# Altium PCB BV100011_UniversalSlave.PcbDoc (part 2 of 2)
Units mil, origin at the board's own origin, x right, y up, seen from the top; angles counter-clockwise.
Board outline 6690 x 4040 mil, 4 copper layers (Top Layer, Layer 1, Layer 2, Bottom Layer), stack 26.156 mil thick; 242 components, 211 nets, 882 pads, 216 vias.
Unrouted connection lines stored in the file: 81.
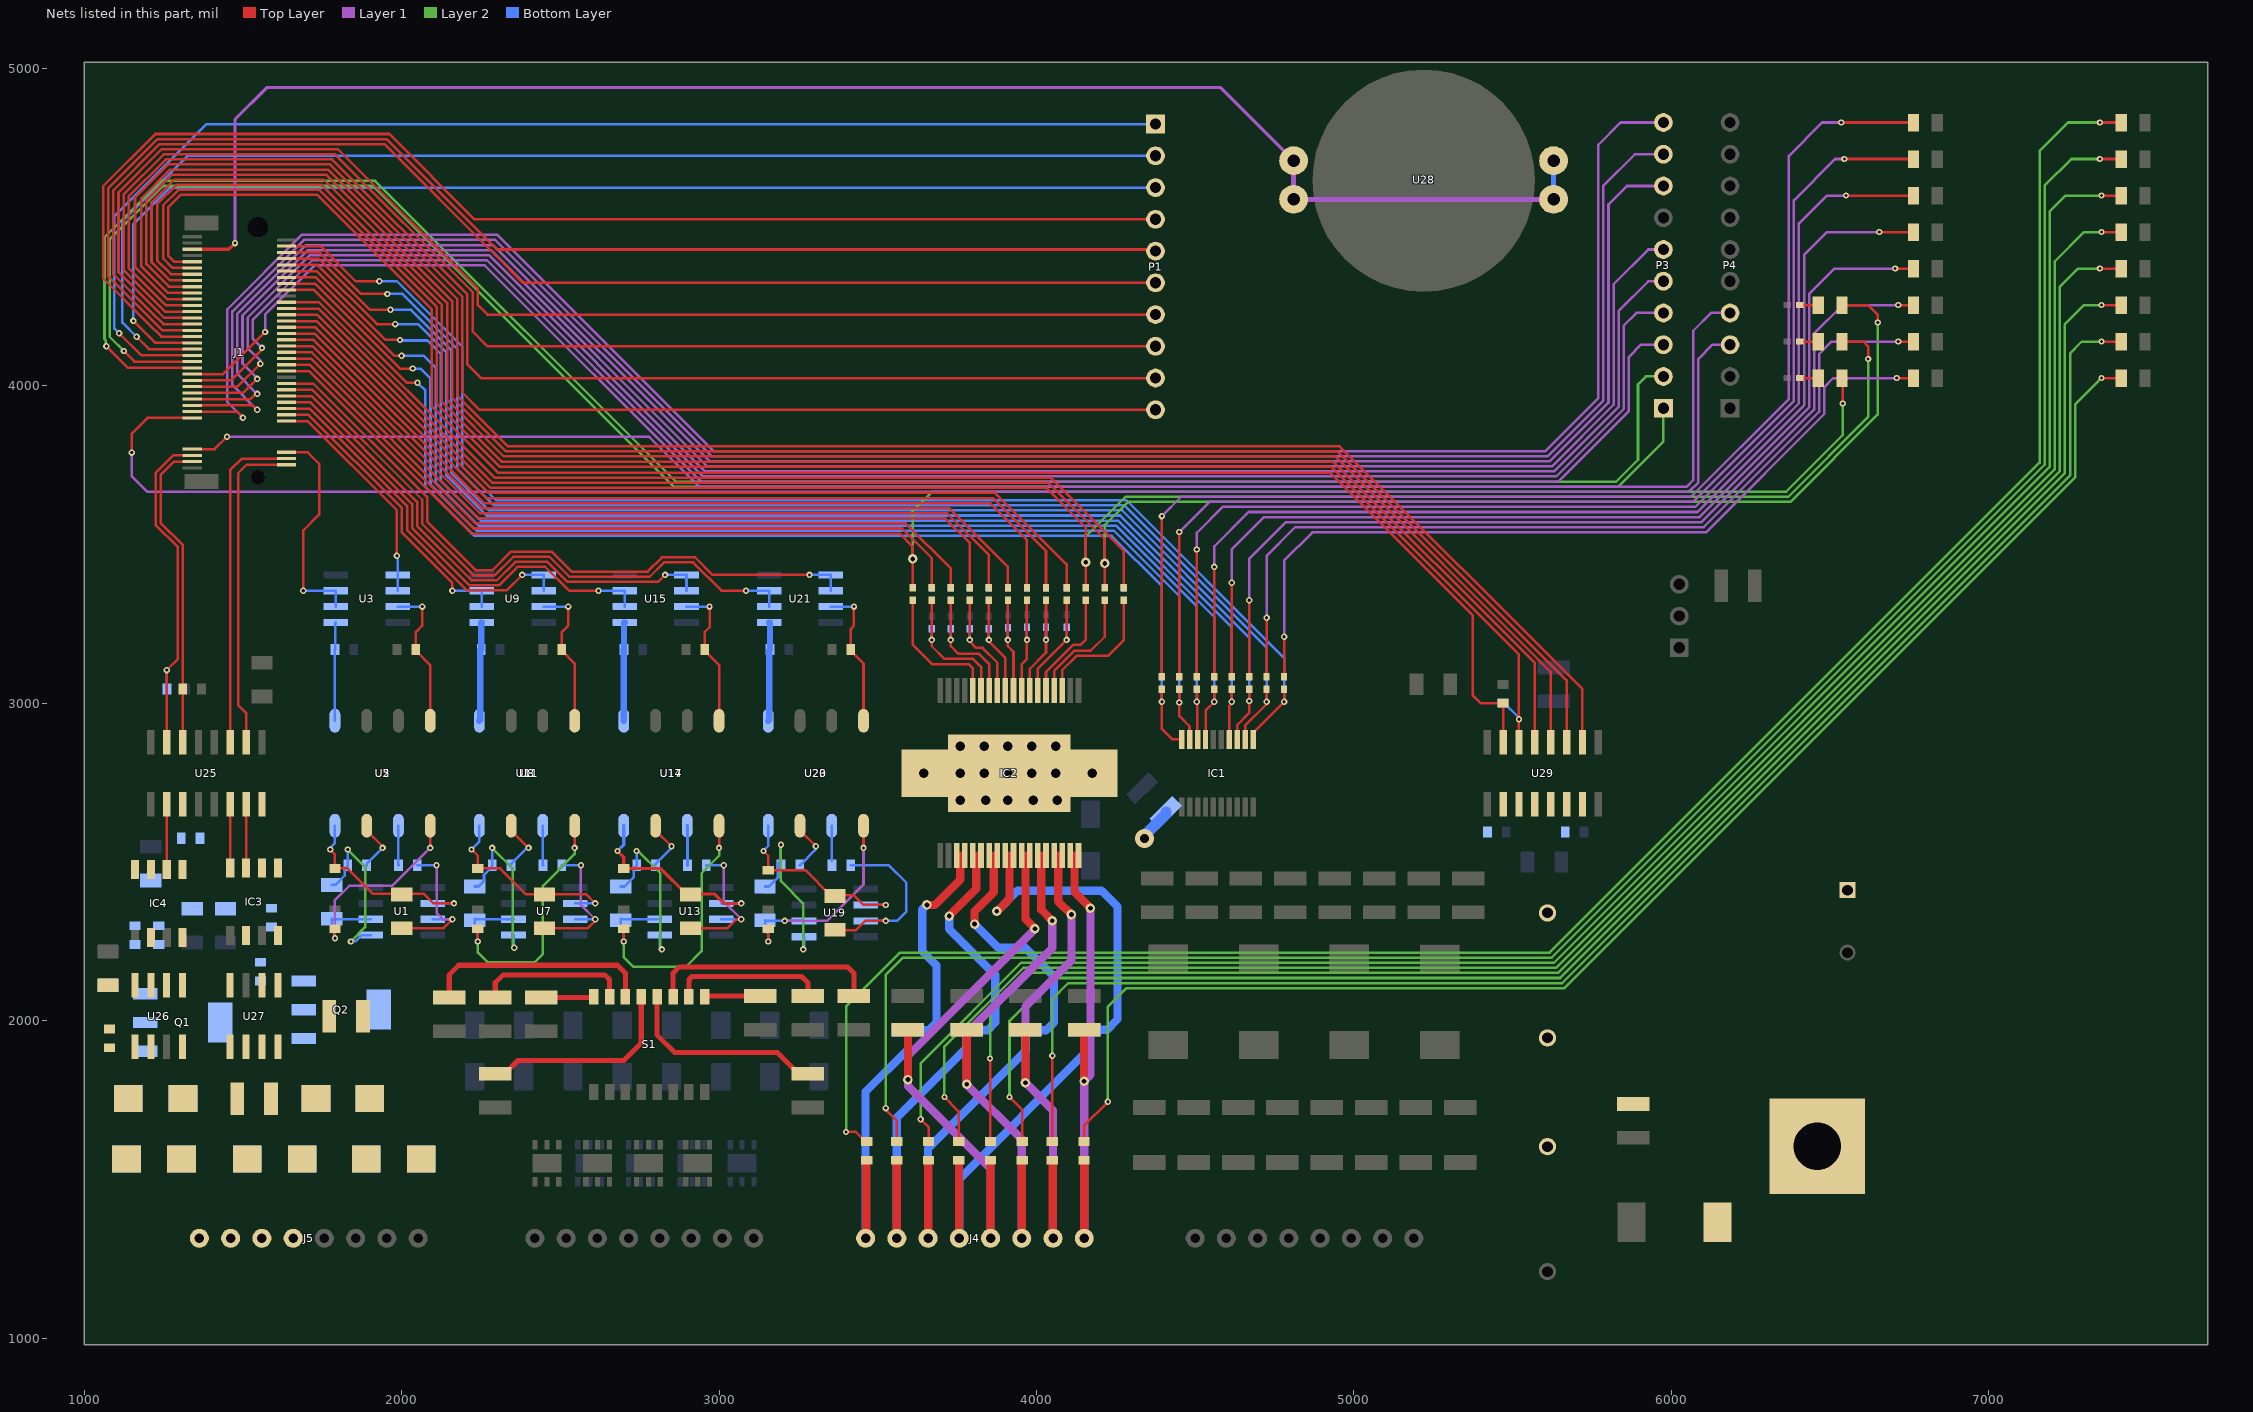
[diagram p4: the nets of this part, all layers, seen from the top]

## Via types
v1: diameter 20, hole 10, Top Layer to Bottom Layer, 166 vias
v2: diameter 30, hole 15, Top Layer to Bottom Layer, 41 vias
v3: diameter 50, hole 28, Top Layer to Bottom Layer, 8 vias
v4: diameter 60, hole 28, Top Layer to Bottom Layer, 1 vias

## Nets (pads, with @x,y where several pads share a name; then routed paths per layer and width w, separated by ;. In a path a pad name is that pad's centre, name@x,y a point inside that pad or via, vN(x,y) a via of type N, cw(c..) or ccw(c..) an arc to the next point about the centre after c; other vN are vias at no path point) (continued)
NetC9_2: C9.2 IC2.9 R37.2 | length 337.8
  Top Layer w8: R37.2@3911.53,3326.84 R37.2@3910,3325.31 v1(3910,3200) 3910,3180 3927.64,3162.36 IC2.9@3927.64,3040
  Bottom Layer w8: v1@3910,3195 v1(3910,3200) C9.2@3910,3237.97
NetC10_2: C10.2 IC2.8 R36.2 | length 332.9
  Top Layer w8: IC2.8@3953.23,3040 3953.23,3123.23 3970,3140 v1(3970,3200) 3970,3255.31 R36.2@3970,3325.31
  Bottom Layer w8: v1(3970,3200) C10.2@3970,3240.63
NetC11_2: C11.2 IC2.7 R35.2 | length 346.8
  Top Layer w8: IC2.7@3978.82,3040 3978.82,3108.82 4030,3160 v1(4030,3200) R35.2@4030,3325.31
  Bottom Layer w8: v1(4030,3200) C11.2@4030,3240.31
NetC12_2: C12.2 IC2.29 IC2.30 J4.5 R27.2 | length 1893.4
  Top Layer w26: v2(3595,1815) C12.2@3595,1971.85 ; R27.2@3855,1560.47 3855.14,1560.33 3855.14,1315.14 J4.5@3855.28,1315 ; 3965,2520 3965,2321.08 3995,2291.08 v2(3995,2290)
  Layer 1 w26: J4.5@3855.28,1315 3855.28,1534.72 3595,1795 v2(3595,1815) 3595,1890 v2(3995,2290)
NetC13_2: C13.2 IC2.6 R34.2 | length 370.6
  Top Layer w8: IC2.6@4004.41,3040 4004.41,3109.41 v1(4095,3200) R34.2@4095,3325.31 R34.2@4096.53,3326.84
  Bottom Layer w8: v1@4095,3195 v1(4095,3200) C13.2@4095,3240.63
NetC14_2: C14.2 IC2.31 IC2.32 J4.6 R28.2 | length 1821.1
  Top Layer w26: v2(3780,1800) C14.2@3780,1971.85 ; J4.6@3953.7,1315 3954.35,1315.65 3954.35,1559.82 R28.2@3955,1560.47 ; 4015,2520 4015,2350 v2(4050,2315)
  Layer 1 w26: J4.6@3953.7,1315 3953.7,1626.3 v2(3780,1800) 3780,1960 4050,2230 v2(4050,2315)
NetC15_2: C15.2 IC2.33 IC2.34 J4.7 R29.2 | length 1732.1
  Top Layer w26: v2(3965,1805) C15.2@3965,1971.85 ; R29.2@4050,1560.47 4050.28,1560.47 4051.06,1559.69 4051.06,1316.06 J4.7@4052.13,1315 ; 4068.39,2520.32 4068.39,2376.61 v2(4110,2335)
  Layer 1 w26: J4.7@4052.13,1315 4052.13,1717.87 v2(3965,1805) 3965,2045 4110,2190 v2(4110,2335)
NetC16_2: C16.2 IC2.35 IC2.36 J4.8 R30.2 | length 1642.3
  Top Layer w26: 4119.57,2520.32 4119.57,2405.43 v2(4170,2355) ; R30.2@4150,1560.47 4150.28,1560.2 4150.28,1315.28 J4.8@4150.55,1315 ; v2(4150,1810) C16.2@4150,1971.85
  Layer 1 w26: v2(4150,1810) 4170,1830 v2(4170,2355) ; J4.8@4150.55,1315 v2@4150.55,1809.45
  Layer 2 w26: v2(4150,1810) v2@4150.55,1809.45
NetC17_1: C17.1 IC2.21 IC2.22 J4.1 R43.1 | length 1668.7
  Top Layer w26: J4.1@3461.57,1315 3464.07,1317.49 3464.07,1560.47 R43.1@3465,1560.47 ; v2(3655,2365) 3680,2365 3760,2445 3760,2520
  Bottom Layer w26: J4.1@3461.57,1315 3461.57,1776.57 3595,1910 C17.1@3595,1971.85 3596.85,1970 3660,1970 3685,1995 3685,2175 3640,2220 3640,2350 v2(3655,2365)
NetC18_1: C18.1 IC2.13 R41.2 | length 437.7
  Top Layer w8: R41.2@3670,3325.31 v1(3670,3200) 3670,3180 3710,3140 3800,3140 3825.28,3114.72 IC2.13@3825.28,3040
  Bottom Layer w8: v1(3670,3200) C18.1@3670,3235.32
NetC19_1: C19.1 IC2.23 IC2.24 J4.2 R45.1 | length 1714.8
  Top Layer w26: J4.2@3560,1315 R45.1@3560,1560.47 ; v2(3725,2330) 3810,2415 3810,2520
  Bottom Layer w26: J4.2@3560,1315 3560,1695 3780,1915 C19.1@3780,1971.85 3781.85,1970 3845,1970 3870,1995 3870,2145 3725,2290 v2(3725,2330)
NetC20_1: C20.1 IC2.12 R40.2 | length 409.1
  Top Layer w8: R40.2@3730,3325.31 v1(3730,3200) 3730,3180 3753,3157 3818,3157 3850.87,3124.13 IC2.12@3850.87,3040
  Bottom Layer w8: v1(3730,3200) 3730,3205 C20.1@3730,3235.63
NetC21_1: C21.1 IC2.25 IC2.26 J4.3 R47.1 | length 1834.3
  Top Layer w26: J4.3@3658.43,1315 3659.21,1315.79 3659.21,1559.69 R47.1@3660,1560.47 ; v2(3805,2305) 3805,2345 3865,2405 3865,2520
  Bottom Layer w26: J4.3@3658.43,1315 3658.43,1598.43 3965,1905 C21.1@3965,1971.85 3966.85,1970 4030,1970 4055,1995 4055,2140 3965,2230 3880,2230 v2(3805,2305)
NetC22_1: C22.1 IC2.11 R39.2 | length 368.2
  Top Layer w8: R39.2@3790,3325.31 v1(3790,3200) 3790,3195 3810,3175 3830,3175 3876.46,3128.54 IC2.11@3876.46,3040
  Bottom Layer w8: v1(3790,3200) C22.1@3790,3235.32
NetC23_1: C23.1 IC2.27 IC2.28 J4.4 R48.1 | length 2159
  Top Layer w26: R48.1@3755,1560.47 3755.15,1560.47 3755.93,1559.69 3755.93,1315.93 J4.4@3756.85,1315 ; v2(3875,2345) 3915,2385 3915,2520
  Bottom Layer w26: J4.4@3756.85,1315 3756.85,1501.85 4150,1895 C23.1@4150,1971.85 4221.85,1971.85 4255,2005 4255,2360 4205,2410 3940,2410 v2(3875,2345)
NetC24_1: C24.1 IC2.10 R38.2 | length 342.2
  Top Layer w8: R38.2@3850,3325.31 3850,3195 3902.05,3142.95 IC2.10@3902.05,3040
  Bottom Layer w8: v1(3850,3200) C24.1@3850,3235.32
NetC30_1: C30.1 C31.1 Earth1.1
NetC32_1: C32.1 R60.1 U1.6 U5.4 | length 636
  Top Layer w8: v1(1775,2540) 1775,2538.89 1790,2523.89 R60.1@1790,2479.53 1790.47,2480 1830,2480 1910,2400 2070,2400 2100,2370 v1(2165,2370)
  Bottom Layer w8: v1(1775,2540) 1775,2545 1790,2560 U5.4@1790,2614.8 ; U1.6@2097.44,2370 v1(2165,2370)
NetC32_2: C32.2 R58.1 U1.7 | length 503
  Top Layer w8: C32.2@2000,2291.85 2131.85,2291.85 v1(2160,2320)
  Layer 1 w8: v1(2110,2490) 2110,2340 2130,2320 v1(2160,2320)
  Bottom Layer w8: R58.1@2049.53,2490 v1(2110,2490) ; U1.7@2097.44,2320 v1(2160,2320)
NetC33_1: C33.1 R62.1 U1.2 U2.4 | length 777.9
  Top Layer w8: v1(1790,2260) R62.1@1790,2290.47 ; v1(2090,2545) U2.4@2090,2614.8
  Layer 1 w8: v1(1790,2260) 1790,2380 1835,2425 1970,2425 v1(2090,2545)
  Bottom Layer w8: v1(1790,2260) 1787.7,2262.3 1787.7,2277.3 1780,2285 C33.1@1780,2321.85 1781.85,2320 U1.2@1902.56,2320
NetC33_2: C33.2 R57.1 U1.1 | length 542.1
  Layer 2 w8: v1(1830,2540) 1885,2485 1885,2295 v1(1840,2250)
  Bottom Layer w8: C33.2@1780,2428.15 1791.81,2428.15 1820.69,2457.03 1820.69,2480.22 R57.1@1830.47,2490 1830,2490.47 v1(1830,2540) ; v1(1840,2250) 1855,2250 1875,2270 U1.1@1902.56,2270
NetC34_1: C34.1 R74.1 U7.6 U11.4 | length 632.1
  Top Layer w8: v1(2220,2540) 2240,2520 R74.1@2240,2479.53 2240.47,2480 2310,2480 2391.85,2398.15 C34.1@2450,2398.15 2581.85,2398.15 v1(2610,2370)
  Bottom Layer w8: v1(2220,2540) 2245,2565 U11.4@2245,2614.65 ; U7.6@2547.44,2370 v1(2610,2370)
NetC34_2: C34.2 R72.1 U7.7 | length 493.3
  Top Layer w8: C34.2@2450,2291.85 2586.85,2291.85 v1@2615,2320
  Layer 1 w8: v1(2565,2490) 2565,2365 v1(2610,2320)
  Bottom Layer w8: R72.1@2504.53,2490 v1(2565,2490) ; U7.7@2547.44,2320 v1(2610,2320) v1@2615,2320
NetC35_1: C35.1 R76.1 U7.2 U8.4 | length 943.6
  Top Layer w8: v1(2240,2250) R76.1@2240,2290.47 ; v1(2545,2545) U8.4@2545,2614.65
  Layer 2 w8: v1(2240,2250) 2240,2215 2270,2185 2420,2185 2445,2210 2445,2425 2545,2525 v1(2545,2545)
  Bottom Layer w8: C35.1@2230,2316.85 2230,2285 2240,2275 v1(2240,2250) ; C35.1@2230,2321.85 2231.85,2320 U7.2@2352.56,2320
NetC35_2: C35.2 R71.1 U7.1 | length 536.9
  Layer 2 w8: v1(2285,2545) 2350,2480 2350,2238.25 2355,2233.25 v1(2355,2230)
  Bottom Layer w8: C35.2@2230,2423.15 2241.81,2423.15 2259.46,2440.8 2259.46,2460.05 2285.47,2486.06 2285,2486.54 v1(2285,2545) ; U7.1@2352.56,2270 2352.56,2232.44 v1(2355,2230)
NetC36_1: C36.1 R80.1 U13.6 U17.4 | length 641.1
  Top Layer w10: v1(2680,2535) 2700,2515 R80.1@2700,2479.53 2816.81,2479.53 2898.19,2398.15 2904.09,2398.15 2905.94,2400 2985,2400 3015,2370 v1@3075,2370
  Bottom Layer w10: v1(2680,2535) 2700,2555 U17.4@2700,2614.65 ; U13.6@3007.44,2370 v1@3075,2370
  other v1: 3070,2370
NetC36_2: C36.2 R78.1 U13.7 | length 482.5
  Top Layer w8: C36.2@2910,2291.85 3026.85,2291.85 3055,2320 v1(3070,2320)
  Layer 1 w8: v1(3015,2490) 3015,2375 v1(3070,2320)
  Bottom Layer w8: R78.1@2959.53,2490 v1(3015,2490) ; U13.7@3007.44,2320 v1(3070,2320)
NetC37_1: C37.1 R82.1 U13.2 U14.4 | length 990.4
  Top Layer w8: v1(2700,2250) 2700,2255 R82.1@2700,2290.47 ; v1@3000,2540 v1(3000,2545) U14.4@3000,2614.65
  Layer 2 w8: v1(2700,2250) 2700,2200 2730,2170 2895,2170 2945,2220 2945,2465 3000,2520 v1(3000,2545)
  Bottom Layer w8: v1(2700,2250) 2700,2275 2690,2285 C37.1@2690,2316.85 2690,2321.85 2691.85,2320 U13.2@2812.56,2320
NetC37_2: C37.2 R77.1 U13.1 | length 534
  Layer 2 w8: v1(2740,2535) 2745,2535 2815,2465 2815,2233.25 2820,2228.25 v1(2820,2225)
  Bottom Layer w8: C37.2@2690,2423.15 2701.81,2423.15 2730.69,2452.03 2730.69,2480.22 R77.1@2740.47,2490 2740,2490.47 v1(2740,2535) ; U13.1@2812.56,2270 2812.56,2232.44 v1(2820,2225)
NetC38_1: C38.1 R86.1 U19.6 U23.4 | length 632
  Top Layer w8: v1(3140,2535) 3155,2520 R86.1@3155,2474.53 3271.81,2474.53 3353.19,2393.15 C38.1@3365,2393.15 3366.85,2395 3425,2395 3455,2365 v1(3525,2365)
  Bottom Layer w8: v1(3140,2535) 3140,2536.11 3155,2551.11 U23.4@3155,2614.65 ; U19.6@3462.44,2365 v1(3525,2365)
NetC38_2: C38.2 R84.1 U19.7 | length 601.4
  Top Layer w8: C38.2@3365,2286.85 3366.85,2285 3430,2285 3460,2315 v1(3525,2315)
  Bottom Layer w8: R84.1@3414.53,2490 3535,2490 3590,2435 3590,2345 3560,2315 v1(3525,2315) U19.7@3462.44,2315
NetC39_1: C39.1 R88.1 U19.2 U20.4 | length 714.9
  Top Layer w8: v1(3155,2250) R88.1@3155,2290.47 ; v1(3455,2545) U20.4@3455,2614.65
  Layer 1 w8: v1(3207.2,2315) 3340,2315 3455,2430 v1(3455,2545)
  Bottom Layer w8: v1(3155,2250) 3155,2273.2 3145,2283.2 C39.1@3145,2316.85 3146.85,2315 v1(3207.2,2315) U19.2@3267.56,2315
NetC39_2: C39.2 R83.1 U19.1 | length 559.9
  Layer 2 w8: v1(3195,2555) 3195,2440 3265,2370 v1(3265,2225)
  Bottom Layer w8: C39.2@3145,2423.15 3156.81,2423.15 3185.69,2452.03 3185.69,2495.22 3195.47,2505 3195,2505.47 v1(3195,2555) ; v1(3265,2225) 3267.56,2227.56 U19.1@3267.56,2265
NetC46_1: C46.1 D20.2 D21.2 D23.2 U26.4
NetC46_2: C46.2 D19.1 D21.1 D22.1 Q1.2 Q1.4 U26.7
NetC47_1: C47.1 D25.2 D26.2 D28.2 U27.4
NetC47_2: C47.2 D24.1 D26.1 D27.1 Q2.2 Q2.4 U27.7
NetD19_2: D19.2 D20.1 J5.1
NetD22_2: D22.2 D23.1 J5.2 | length 21.2
  Bottom Layer w10: D23.1@1118.39,1550 D23.1@1133.39,1565
NetD24_2: D24.2 D25.1 J5.3
NetD27_2: D27.2 D28.1 J5.4
NetIC2_3: IC2.3 R31.2 | length 423.4
  Top Layer w8: IC2.3@4081.18,3040 4081.18,3104.81 4126.37,3150 4177.63,3150 4225,3150 4275,3200 R31.2@4275,3325.31
NetIC2_4: IC2.4 R32.2 | length 381.4
  Top Layer w8: IC2.4@4055.59,3040 4055.59,3101.85 4119.74,3166 4171,3166 4215,3210 R32.2@4215,3325.31
NetIC2_5: IC2.5 R33.2 | length 351.1
  Top Layer w8: IC2.5@4030,3040 4030,3098.89 4116.11,3185 4140,3185 4155,3200 R33.2@4155,3325.31
NetIC2_14: IC2.14 R42.2 | length 431.3
  Top Layer w8: R42.2@3610,3325.31 3610,3185 3671,3124 3786,3124 3799.68,3110.32 IC2.14@3799.68,3040
NetIC3_2: IC3.2 R91.1 U25.11
NetIC3_3: IC3.3 IC4.3 U25.15 | length 200.9
  Top Layer w8: IC3.3@1510,2481.77 U25.15@1510,2682.72
NetIC3_4: IC3.4 IC4.4 U25.14 | length 200.9
  Top Layer w8: IC3.4@1460,2481.77 U25.14@1460,2682.72
NetIC3_8: IC3.8 R96.1
NetIC4_2: IC4.2 R92.1 U25.10 | length 208
  Top Layer w8: IC4.2@1255,2476.77 1260,2481.77 U25.10@1260,2682.72
NetIC4_8: IC4.8 R94.1
NetJ1_2: J1.2 U25.2 | length 1021.1
  Top Layer w8: U25.2@1510,2877.6 1510,2970 1485,2995 1485,3725 1511.77,3751.77 J1.2@1637.24,3751.77
NetJ1_3: J1.3 R90.1 U25.6 | length 988.6
  Top Layer w8: U25.6@1310,2877.6 1310,3045.47 R90.1@1310.47,3045 1311,3045.53 1311,3499 1241,3569 1241,3719.4 1283.22,3761.61 J1.3@1340,3761.61
NetJ1_4: J1.4 U25.3 | length 1049.7
  Top Layer w8: U25.3@1460,2877.6 1460,3735 1496.46,3771.46 J1.4@1637.24,3771.46
NetJ1_5: J1.5 R89.1 U25.7 | length 1090
  Top Layer w8: U25.7@1260,2877.6 v1(1260,3105) 1295,3140 1295,3492.37 1225,3562.37 1225,3726.02 1280.28,3781.3 J1.5@1340,3781.3
  Bottom Layer w8: v1(1260,3105) 1260.47,3104.53 R89.1@1260.47,3045
NetJ1_6: J1.6 U3.6 U3.7 | length 691
  Top Layer w8: J1.6@1637.24,3791.14 1703.86,3791.14 1740,3755 1740,3595 1690,3545 v1(1690,3355)
  Bottom Layer w8: v1(1690,3355) U3.7@1792.56,3355 U3.6@1792.56,3305
NetJ1_7: J1.7 P4.4 | length 5428.6
  Top Layer w8: J1.7@1340,3800.98 1410.98,3800.98 v1(1450,3840)
  Layer 1 w8: v1(1450,3840) 2779.24,3840 2936.24,3683 6048.88,3683 6069,3703.12 6069,4174 6125,4230 P4.4@6185,4230
NetJ1_8: J1.8 U3.1 U3.2 | length 718.7
  Top Layer w8: J1.8@1637.24,3889.57 1703.9,3889.57 1985,3608.47 v1(1985,3465)
  Bottom Layer w8: v1(1985,3465) 1987.44,3462.56 U3.1@1987.44,3405 U3.2@1987.44,3355
NetJ1_9: J1.9 P4.3 | length 5819.7
  Top Layer w8: v1(1150,3790) 1150,3850 1199.41,3899.41 J1.9@1340,3899.41
  Layer 1 w8: v1(1150,3790) 1150,3715 1198,3667 6055.51,3667 6085,3696.49 6085,4085 6130,4130 P4.3@6185,4130
NetJ1_10: J1.10 U9.6 U9.7 | length 954.1
  Top Layer w8: J1.10@1637.24,3909.25 1706.85,3909.25 2001,3615.1 2001,3539 2160,3380 v1(2160,3355)
  Bottom Layer w8: v1(2160,3355) U9.7@2252.56,3355 U9.6@2252.56,3305
NetJ1_11: J1.11 P3.10 | length 6329.5
  Top Layer w8: J1.11@1340,3919.09 1480.91,3919.09 v1(1500,3900)
  Layer 1 w8: v1(1500,3900) 1450.73,3949.27 1450.73,4241.49 1685.24,4476 2301.63,4476 2982.63,3795 5603,3795 5770,3962 5770,4760 5840,4830 P3.10@5975,4830
NetJ1_12: J1.12 U9.1 U9.2 | length 1162.4
  Top Layer w8: J1.12@1637.24,3928.94 1709.79,3928.94 2017,3621.73 2017,3545.63 2206.63,3356 2331,3356 v1(2380,3405)
  Bottom Layer w8: v1(2380,3405) U9.1@2447.44,3405 U9.2@2447.44,3355
NetJ1_13: J1.13 P3.9 | length 6227
  Top Layer w8: J1.13@1340,3938.78 1531.22,3938.78 v1(1545,3925)
  Layer 1 w8: v1(1545,3925) 1466.73,4003.27 1466.73,4234.86 1691.86,4460 2295,4460 2976,3779 5610.86,3779 5786,3954.14 5786,4631 5885,4730 P3.9@5975,4730
NetJ1_14: J1.14 U15.6 U15.7 | length 1453.8
  Top Layer w8: J1.14@1637.24,3948.62 1712.73,3948.62 2033,3628.35 2033,3552.25 2213.25,3372 2307,3372 2365,3430 2452.37,3430 2527.37,3355 v1(2620,3355)
  Bottom Layer w8: v1(2620,3355) U15.7@2702.56,3355 U15.6@2702.56,3305
NetJ1_15: J1.15 P3.8 | length 6079.5
  Top Layer w8: J1.15@1340,3958.46 1523.46,3958.46 1540,3975 v1(1545,3975)
  Layer 1 w8: v1(1545,3975) 1482.73,4037.27 1482.73,4228.24 1698.49,4444 2288.37,4444 2969.37,3763 5617.49,3763 5802,3947.51 5802,4572 5860,4630 P3.8@5975,4630
NetJ1_16: J1.16 U15.1 U15.2 | length 1654.4
  Top Layer w8: J1.16@1637.24,3968.31 1715.67,3968.31 2049,3634.98 2049,3558.88 2219.88,3388 2300.37,3388 2358.37,3446 2459,3446 2522,3383 2808,3383 v1(2830,3405)
  Bottom Layer w8: v1(2830,3405) U15.1@2897.44,3405 U15.2@2897.44,3355
NetJ1_17: J1.17 P3.6 | length 5790.7
  Top Layer w8: J1.17@1340,3978.15 1500.65,3978.15 v1(1545,4022.5)
  Layer 1 w8: v1(1545,4022.5) 1545,4025 1498.73,4071.27 1498.73,4221.61 1705.12,4428 2281.75,4428 2962.75,3747 5624.12,3747 5818,3940.88 5818,4320.41 5927.59,4430 P3.6@5975,4430
NetJ1_18: J1.18 U21.6 U21.7 | length 1962.4
  Top Layer w8: J1.18@1637.24,3987.99 1718.62,3987.99 2065,3641.61 2065,3565.51 2226.51,3404 2293.75,3404 2351.75,3462 2465.63,3462 2528.63,3399 2781.63,3399 2826.63,3444 2918.37,3444 3007.37,3355 v1(3085,3355)
  Bottom Layer w8: v1(3085,3355) U21.7@3157.56,3355 U21.6@3157.56,3305
NetJ1_19: J1.19 P3.5 | length 5655.6
  Top Layer w8: J1.19@1340,3997.83 1482.83,3997.83 v1(1555,4070)
  Layer 1 w8: v1(1555,4070) 1555,4080 1514.73,4120.27 1514.73,4214.98 1711.75,4412 2275.12,4412 2956.12,3731 5630.75,3731 5834,3934.25 5834,4236.41 5927.59,4330 P3.5@5975,4330
NetJ1_20: J1.20 U21.1 U21.2 | length 2144.7
  Top Layer w8: J1.20@1637.24,4007.68 1721.56,4007.68 2081,3648.24 2081,3572.14 2233.14,3420 2287.12,3420 2345.12,3478 2472.25,3478 2535.25,3415 2775,3415 2820,3460 2925,3460 2980,3405 v1(3285,3405)
  Bottom Layer w8: v1(3285,3405) U21.1@3352.44,3405 U21.2@3352.44,3355
NetJ1_21: J1.21 P3.4 | length 5540.3
  Top Layer w8: J1.21@1340,4017.52 1462.52,4017.52 1558.31,4113.31 1558.31,4121.69 v1(1560,4120)
  Layer 1 w8: v1(1560,4120) 1530.73,4149.27 1530.73,4208.35 1718.37,4396 2268.49,4396 2949.49,3715 5637.37,3715 5850,3927.63 5850,4190 5890,4230 P3.4@5975,4230
NetJ1_23: J1.23 P3.3 | length 5369.4
  Top Layer w8: J1.23@1340,4037.2 1437.2,4037.2 v1(1570,4170)
  Layer 1 w8: v1(1570,4170) 1570,4225 1725,4380 2261.86,4380 2942.86,3699 5644,3699 5866,3921 5866,4091 5905,4130 P3.3@5975,4130
NetJ1_24: J1.24 LED15.1 R42.1 | length 5692.2
  Top Layer w8: J1.24@1637.24,4047.05 1708.03,4047.05 2220.08,3535 3570,3535 3610,3495 R42.1@3610,3364.68 ; LED15.1@6537.4,4025 6540,4022.4 v1(6540,3945)
  Layer 2 w8: v2(3610,3455) 3610,3605 3672,3667 6362,3667 6540,3845 v1(6540,3945)
NetJ1_25: J1.25 P3.2 | length 6297.2
  Top Layer w8: v1(1070,4125) 1138.11,4056.89 J1.25@1340,4056.89
  Layer 2 w8: v1(1070,4125) 1067.7,4127.3 1067.7,4144.67 1064,4148.37 1064,4468.59 1241.41,4646 1916.63,4646 2863.63,3699 5826.37,3699 5895,3767.63 5895,4005 5920,4030 P3.2@5975,4030
NetJ1_26: J1.26 R41.1 R46.1 | length 2378
  Top Layer w8: J1.26@1637.24,4066.73 1710.97,4066.73 2226.71,3551 3576.63,3551 3670,3457.63 R41.1@3670,3364.68
NetJ1_27: J1.27 P3.1 | length 6120.1
  Top Layer w8: v1(1125,4110) 1158.43,4076.57 J1.27@1340,4076.57
  Layer 2 w8: v1(1125,4110) 1080,4155 1080,4461.96 1248.04,4630 1910,4630 2857,3683 5833,3683 5975,3825 P3.1@5975,3930
NetJ1_28: J1.28 R40.1 R49.1 | length 2427
  Top Layer w8: J1.28@1637.24,4086.42 1713.92,4086.42 2233.33,3567 3588,3567 3730,3425 R40.1@3730,3364.68
NetJ1_29: J1.29 P1.1 | length 4034.2
  Top Layer w8: v1(1110,4166.11) 1179.85,4096.26 J1.29@1340,4096.26
  Bottom Layer w8: v1(1110,4166.11) 1095,4181.11 1095,4535 1385,4825 P1.1@4375,4825
NetJ1_30: J1.30 R39.1 R50.1 | length 2541.9
  Top Layer w8: J1.30@1637.24,4106.1 1716.86,4106.1 2239.96,3583 3711.75,3583 3790,3504.75 R39.1@3790,3364.68
NetJ1_31: J1.31 P1.2 | length 3914.7
  Top Layer w8: v1(1165,4155) 1204.06,4115.94 J1.31@1340,4115.94
  Bottom Layer w8: v1(1165,4155) 1120,4200 1120,4520 1325,4725 P1.2@4375,4725
NetJ1_32: J1.32 R38.1 R51.1 | length 2588.2
  Top Layer w8: J1.32@1637.24,4125.79 1719.8,4125.79 2246.59,3599 3718.37,3599 3850,3467.37 R38.1@3850,3364.68
NetJ1_33: J1.33 P1.3 | length 3786.4
  Top Layer w8: v1(1155,4205) 1224.37,4135.63 J1.33@1340,4135.63
  Bottom Layer w8: v1(1155,4205) 1155,4510 1270,4625 P1.3@4375,4625
NetJ1_34: J1.34 R37.1 R52.1 | length 2634.4
  Top Layer w8: J1.34@1637.24,4145.47 1722.74,4145.47 2253.22,3615 3725,3615 3910,3430 R37.1@3910,3364.68
NetJ1_35: J1.35 P1.4 | length 4141.3
  Top Layer w8: J1.35@1340,4155.31 1243.36,4155.31 1201.68,4197 1060,4338.68 1060,4629.79 1224.01,4793.8 1961.2,4793.8 2230,4525 P1.4@4375,4525
NetJ1_36: J1.36 R36.1 R53.1 | length 2752.4
  Top Layer w8: J1.36@1637.24,4165.16 1725.69,4165.16 2259.84,3631 3854,3631 3970,3515 R36.1@3970,3364.68
NetJ1_37: J1.37 P1.5 | length 4121.6
  Top Layer w8: J1.37@1340,4175 1246.3,4175 1208.3,4213 1076,4345.3 1076,4623.16 1230.64,4777.8 1952.2,4777.8 2300,4430 4370,4430 P1.5@4375,4425
NetJ1_38: J1.38 R35.1 R54.1 | length 2800
  Top Layer w8: J1.38@1637.24,4184.84 1728.63,4184.84 2266.47,3647 3863,3647 4030,3480 R35.1@4030,3364.68
NetJ1_39: J1.39 P1.6 | length 4101.8
  Top Layer w8: J1.39@1340,4194.69 1249.25,4194.69 1214.93,4229 1092,4351.93 1092,4616.53 1237.27,4761.8 1945.57,4761.8 2293.37,4414 2382.37,4325 P1.6@4375,4325
NetJ1_40: J1.40 R34.1 R55.1 | length 2848.4
  Top Layer w8: J1.40@1637.24,4204.53 1731.57,4204.53 2273.1,3663 3869.63,3663 4095,3437.63 R34.1@4095,3364.68
NetJ1_41: J1.41 P1.7 | length 4111.4
  Top Layer w8: J1.41@1340,4214.37 1252.19,4214.37 1221.56,4245 1108,4358.56 1108,4609.91 1243.9,4745.8 1799.2,4745.8 2240,4305 2240,4255 2270,4225 P1.7@4375,4225
NetJ1_42: J1.42 LED13.1 R33.1 | length 5998
  Top Layer w8: J1.42@1637.24,4224.21 1734.51,4224.21 2279.73,3679 4031,3679 4155,3555 R33.1@4155,3364.68 ; LED13.1@6537.4,4140 6605,4140 6620,4125 v1(6620,4085)
  Layer 2 w8: v2(4155,3445) 4155,3525 4281,3651 6368.63,3651 6620,3902.37 v1(6620,4085)
NetJ1_43: J1.43 P1.8 | length 4135.6
  Top Layer w8: J1.43@1340,4234.06 1255.13,4234.06 1228.18,4261 1124,4365.19 1124,4603.28 1250.52,4729.8 1790.2,4729.8 2224,4296 2224,4171 2270,4125 P1.8@4375,4125
NetJ1_44: J1.44 LED14.1 R32.1 | length 6171.9
  Top Layer w8: J1.44@1637.24,4243.9 1737.46,4243.9 2286.35,3695 4037.63,3695 4215,3517.63 v2(4215,3441.16) R32.1@4215,3364.68 ; LED14.1@6537.4,4255 6620,4255 6650,4225 v1(6650,4200)
  Layer 2 w8: v2(4215,3441.16) 4215,3562.37 4287.63,3635 6375.25,3635 6650,3909.75 v1(6650,4200)
NetJ1_45: J1.45 P1.9 | length 4171.5
  Top Layer w8: J1.45@1340,4253.74 1258.07,4253.74 1140,4371.81 1140,4596.65 1257.15,4713.8 1781.2,4713.8 2207,4288 2207,4068 2250,4025 P1.9@4375,4025
NetJ1_46: J1.46 R31.1 R56.1 | length 3077.8
  Top Layer w8: J1.46@1637.24,4263.58 1740.4,4263.58 2292.98,3711 4044.25,3711 4275,3480.25 R31.1@4275,3364.68
NetJ1_47: J1.47 P1.10 | length 4196.6
  Top Layer w8: J1.47@1340,4273.43 1261.01,4273.43 1160,4374.44 1160,4594.02 1263.78,4697.8 1774.57,4697.8 2191,4281.37 2191,3979 2245,3925 P1.10@4375,3925
NetJ1_49: J1.49 U29.2 | length 6010.5
  Top Layer w8: J1.49@1340,4293.11 1263.96,4293.11 1180,4377.07 1180,4591.4 1270.41,4681.8 1767.94,4681.8 2175,4274.75 2175,3970 2335,3810 4955,3810 5720,3045 U29.2@5720,2877.6
NetJ1_51: J1.51 U29.3 | length 5915.3
  Top Layer w8: J1.51@1340,4312.8 1266.9,4312.8 1196,4383.69 1196,4584.77 1277.03,4665.8 1761.31,4665.8 2159,4268.12 2159,3963.37 2328.37,3794 4948.37,3794 5670,3072.37 U29.3@5670,2877.6
NetJ1_53: J1.53 U29.4 | length 5820.2
  Top Layer w8: J1.53@1340,4332.48 1269.84,4332.48 1212,4390.32 1212,4578.14 1283.66,4649.8 1754.69,4649.8 2143,4261.49 2143,3956.75 2321.75,3778 4941.75,3778 5620,3099.75 U29.4@5620,2877.6
NetJ1_55: J1.55 U29.5 | length 5723.4
  Top Layer w8: J1.55@1340,4352.17 1272.78,4352.17 1230,4394.95 1230,4573.51 1290.29,4633.8 1748.06,4633.8 2127,4254.86 2127,3950.12 2316.12,3761 4936.12,3761 5570,3127.12 U29.5@5570,2877.6
NetJ1_57: J1.57 R97.2 U29.6 | length 5698.8
  Top Layer w8: J1.57@1340,4371.85 1278.15,4371.85 1249,4401 1249,4569.89 1296.92,4617.8 1741.43,4617.8 2111,4248.24 2111,3943.49 2309.49,3745 4929.49,3745 5520,3154.49 v1(5520,2950) U29.6@5520,2877.6
  Bottom Layer w8: R97.2@5469.53,3001.2 5473.46,3001.2 5517.7,2956.96 5517.7,2952.3 v1(5520,2950)
NetJ1_59: J1.59 R98.2 U29.7 | length 5570.8
  Top Layer w8: J1.59@1340,4391.54 1283.46,4391.54 1265,4410 1265,4563.26 1303.54,4601.8 1734.8,4601.8 2095,4241.61 2095,3935 2303,3727 4924.86,3727 5375,3276.86 5375,3024.69 5379.69,3020 5380,3020 5400,3000 5469.53,3000 R98.2@5470,3000.47 U29.7@5470,2877.6
NetJ1_63: J1.63 U28.1 U28.2 U28.3 U28.4 | length 5050.6
  Top Layer w10: J1.63@1340,4430.91 1455.91,4430.91 v1(1475,4450)
  Layer 1 w8: U28.2@5628.9,4710 5628.9,4696.1 U28.2@5630,4695
  Layer 1 w10: v1(1475,4450) 1475,4840 1575,4940 4580,4940 U28.3@4810,4710
  Layer 1 w16: U28.3@4810,4710 U28.4@4810,4587.95 U28.1@5628.9,4587.95
  Bottom Layer w16: U28.1@5628.9,4587.95 5628.9,4668.9 U28.2@5635,4675
NetLED1_2: LED1.2 R4.1 | length 3835.3
  Top Layer w8: R4.1@4395,3084.68 v1(4395,3590) ; v1(6535,4830) LED1.2@6762.6,4830
  Layer 1 w8: v1(4395,3590) 4456,3651 6062.14,3651 6370,3958.86 6370,4725 6475,4830 v1(6535,4830)
NetLED2_2: LED2.2 R5.1 | length 3625.3
  Top Layer w8: R5.1@4450,3084.68 v1(4450,3540) ; v1(6545,4715) LED2.2@6762.6,4715
  Layer 1 w8: v1(4450,3540) 4545,3635 6068.76,3635 6386,3952.24 6386,4585 6516,4715 v1(6545,4715)
NetLED3_2: LED3.2 R6.1 | length 3482.4
  Top Layer w8: R6.1@4505,3084.68 v1(4505,3485) ; v1(6550,4600) LED3.2@6762.6,4600
  Layer 1 w8: v1(4505,3485) 4505,3537.63 4586.37,3619 6075.39,3619 6402,3945.61 6402,4512 6490,4600 v1(6550,4600)
NetLED4_2: LED4.2 R7.1 | length 3300.7
  Top Layer w8: R7.1@4560,3084.68 v1(4560,3430) ; v1(6655,4485) LED4.2@6762.6,4485
  Layer 1 w8: v1(4560,3430) 4560,3495 4668,3603 6082.02,3603 6418,3938.98 6418,4413 6490,4485 v1(6655,4485)
NetLED5_2: LED5.2 R17.1 | length 3124
  Top Layer w8: R17.1@4615,3084.68 v1(4615,3380) ; v1(6705,4370) LED5.2@6762.6,4370
  Layer 1 w8: v1(4615,3380) 4615,3485 4717,3587 6088.65,3587 6434,3932.35 6434,4290 6514,4370 v1(6705,4370)
NetLED6_2: LED6.2 R18.1 | length 2934.4
  Top Layer w8: R18.1@4670,3084.68 v1(4670,3325) ; v1(6715,4255) LED6.2@6762.6,4255
  Layer 1 w8: v1(4670,3325) 4670,3455 4786,3571 6095.27,3571 6450,3925.73 6450,4165 6540,4255 v1(6715,4255)
NetLED7_2: LED7.2 R19.1 | length 2804.1
  Top Layer w8: R19.1@4725,3084.68 v1(4725,3270) ; v1(6715,4140) LED7.2@6762.6,4140
  Layer 1 w8: v1(4725,3270) 4725,3465 4815,3555 6101.9,3555 6466,3919.1 6466,4101 6505,4140 v1(6715,4140)
NetLED8_2: LED8.2 R20.1 | length 2635.6
  Top Layer w8: R20.1@4780,3084.68 v1(4780,3210) ; v1(6710,4025) LED8.2@6762.6,4025
  Layer 1 w8: v1(4780,3210) 4780,3450 4869,3539 6108.53,3539 6482,3912.47 6482,3997 6510,4025 v1(6710,4025)
NetLED9_2: LED9.2 R27.1 | length 5297.3
  Top Layer w8: v1(3853.75,1881.25) 3853.75,1620.78 R27.1@3855,1619.53 ; v1(7350,4370) 7350,4365 7355,4370 LED9.2@7417.6,4370
  Layer 2 w8: v1(3853.75,1881.25) 3853.75,2039.75 3965,2151 5643.12,2151 7224,3731.88 7224,4313 7281,4370 v1(7350,4370)
NetLED10_2: LED10.2 R28.1 | length 5108.9
  Top Layer w8: v1(3915,1760) 3955,1720 R28.1@3955,1619.53 ; v1(7355,4255) LED10.2@7417.6,4255
  Layer 2 w8: v1(3915,1760) 3915,2000 4050,2135 5649.75,2135 7240,3725.25 7240,4195 7300,4255 v1(7355,4255)
NetLED11_2: LED11.2 R29.1 | length 4900.1
  Top Layer w8: R29.1@4050,1619.53 v1(4050,1890) ; v1(7355,4140) LED11.2@7417.6,4140
  Layer 2 w8: v1(4050,1890) 4050,2069 4100,2119 5656.37,2119 7256,3718.63 7256,4103 7293,4140 v1(7355,4140)
NetLED12_2: LED12.2 R30.1 | length 4604
  Top Layer w8: R30.1@4150,1619.53 4150,1670 v1(4225,1745) ; v1(7355,4025) LED12.2@7417.6,4025
  Layer 2 w8: v1(4225,1745) 4225,2045 4283,2103 5663,2103 7272,3712 7272,3942 v1(7355,4025)
NetLED13_2: LED13.2 R25.2 | length 57.9
  Top Layer w8: R25.2@6404.69,4140 LED13.2@6462.6,4140
NetLED14_2: LED14.2 R26.2 | length 57.9
  Top Layer w8: R26.2@6404.69,4255 LED14.2@6462.6,4255
NetLED15_2: LED15.2 R44.1 | length 57.9
  Top Layer w8: R44.1@6404.69,4025 LED15.2@6462.6,4025
NetLED16_2: LED16.2 R43.2 | length 6218.8
  Top Layer w8: v1(3400,1650) 3430.59,1650 3461.06,1619.53 R43.2@3465,1619.53 ; v1(7350,4830) LED16.2@7417.6,4830
  Layer 2 w8: v1(3400,1650) 3400,2045 3570,2215 5616.61,2215 7160,3758.39 7160,4740 7250,4830 v1(7350,4830)
NetLED17_2: LED17.2 R45.2 | length 6012.1
  Top Layer w8: v1(3525,1725) 3525,1720 3560,1685 R45.2@3560,1619.53 ; v1(7350,4715) LED17.2@7417.6,4715
  Layer 2 w8: v1(3525,1725) 3525,2145 3579,2199 5623.24,2199 7176,3751.76 7176,4631 7260,4715 v1(7350,4715)
NetLED18_2: LED18.2 R47.2 | length 5643.5
  Top Layer w8: v1(3635,1690) 3660,1665 R47.2@3660,1619.53 ; v1(7355,4600) LED18.2@7417.6,4600
  Layer 2 w8: v1(3635,1690) 3635,1866.25 3951.75,2183 5629.86,2183 7192,3745.14 7192,4550 7242,4600 v1(7355,4600)
NetLED19_2: LED19.2 R48.2 | length 5471.8
  Top Layer w8: v1(3710,1760) 3755,1715 R48.2@3755,1619.53 ; v1(7355,4485) LED19.2@7417.6,4485
  Layer 2 w8: v1(3710,1760) 3710,1918.63 3958.37,2167 5636.49,2167 7208,3738.51 7208,4393 7300,4485 v1(7355,4485)
NetQ1_1: Q1.1 U26.6
NetQ1_3: Q1.3 U26.5
NetQ2_1: Q2.1 U27.6
NetQ2_3: Q2.3 U27.5
NetR57_2: R57.2 U2.2 | length 166.4
  Top Layer w8: U2.2@1890,2614.8 1890,2600 1940,2550 v1(1940,2545)
  Bottom Layer w8: R57.2@1889.53,2490 1889.53,2493.94 1940,2544.41 v1(1940,2545)
NetR58_2: R58.2 U5.2 | length 125
  Bottom Layer w8: U5.2@1990,2614.8 1990,2490.47 R58.2@1990.47,2490
NetR59_1: R59.1 U3.5 U5.5 | length 310.5
  Bottom Layer w8: U5.5@1790,2945.51 1790,3169.53 R59.1@1790.47,3170 1790.47,3252.91 U3.5@1792.56,3255
NetR61_1: R61.1 U2.5 U3.3 | length 464.4
  Top Layer w8: v1(2065,3305) 2065,3245.19 2045,3225.19 2045,3170.47 R61.1@2044.53,3170 2044.53,3166.06 2090,3120.59 U2.5@2090,2945.51
  Bottom Layer w8: U3.3@1987.44,3305 v1(2065,3305)
NetR63_2: R63.2 S1.2 | length 166.2
  Top Layer w16: R63.2@2440,2073.15 2602.13,2073.15 S1.2@2605,2076.02
NetR64_2: R64.2 S1.4 | length 477.4
  Top Layer w16: R64.2@2295,2073.15 2295,2120 2320,2145 2640,2145 2655,2130 S1.4@2655,2076.02
NetR65_2: R65.2 S1.6 | length 723.6
  Top Layer w16: R65.2@2150,2073.15 2150,2145 2180,2175 2680,2175 2705,2150 S1.6@2705,2076.02
NetR66_2: R66.2 S1.8 | length 646.1
  Top Layer w16: R66.2@2295,1833.15 2324.53,1833.15 2366.38,1875 2700,1875 2755,1930 S1.8@2755,2076.02
NetR67_2: R67.2 S1.16 | length 175.9
  Top Layer w16: S1.16@2955,2076.02 2957.13,2078.15 R67.2@3130,2078.15
NetR68_2: R68.2 S1.14 | length 483.3
  Top Layer w16: S1.14@2905,2076.02 2905,2130 2915,2140 3260,2140 3280,2120 R68.2@3280,2078.15
NetR69_2: R69.2 S1.12 | length 732.4
  Top Layer w16: S1.12@2855,2076.02 2855,2150 2875,2170 3405,2170 3425,2150 R69.2@3425,2078.15
NetR70_2: R70.2 S1.10 | length 646.5
  Top Layer w16: S1.10@2805,2076.02 2805,1955 2860,1900 3183.62,1900 3250.47,1833.15 R70.2@3280,1833.15
NetR71_2: R71.2 U8.2 | length 173
  Top Layer w8: U8.2@2345,2614.65 2345,2600 v1(2400,2545)
  Bottom Layer w8: R71.2@2344.53,2490 2344.53,2493.94 2393.29,2542.7 2397.7,2542.7 v1(2400,2545)
NetR72_2: R72.2 U11.2 | length 124.8
  Bottom Layer w8: U11.2@2445,2614.65 2445,2490.47 R72.2@2445.47,2490
NetR73_1: R73.1 U9.5 U11.5 | length 313.3
  Bottom Layer w20: U11.5@2245,2945.35 2247.58,2947.93 2247.58,3167.1 R73.1@2250.47,3170 2250.47,3253.78 2251.69,3255 U9.5@2252.56,3255
NetR75_1: R75.1 U8.5 U9.3 | length 462.4
  Top Layer w8: v1(2525,3305) 2525,3245.19 2505,3225.19 2505,3170.47 R75.1@2504.53,3170 2504.53,3166.06 2545,3125.59 U8.5@2545,2945.35
  Bottom Layer w8: U9.3@2447.44,3305 v1(2525,3305)
NetR77_2: R77.2 U14.2 | length 166.3
  Top Layer w8: U14.2@2800,2614.65 2800,2600 v1(2850,2550)
  Bottom Layer w8: R77.2@2799.53,2490 2799.53,2493.94 2850,2544.41 v1(2850,2550)
NetR78_2: R78.2 U17.2 | length 124.8
  Bottom Layer w10: U17.2@2900,2614.65 2900.24,2614.41 2900.24,2490.24 R78.2@2900.47,2490
NetR79_1: R79.1 U15.5 U17.5 | length 311.2
  Bottom Layer w20: U17.5@2700,2945.35 2700.24,2945.59 2700.24,3169.76 R79.1@2700.47,3170 2700.47,3253.78 2701.69,3255 U15.5@2702.56,3255
NetR81_1: R81.1 U14.5 U15.3 | length 457.4
  Top Layer w8: v1(2970,3305) 2970,3240 2955,3225 2955,3166.54 2954.53,3166.06 3000,3120.59 U14.5@3000,2945.35
  Bottom Layer w8: U15.3@2897.44,3305 v1(2970,3305)
NetR83_2: R83.2 U20.2 | length 166.3
  Top Layer w8: U20.2@3255,2614.65 3255,2600 v1(3305,2550)
  Bottom Layer w8: R83.2@3254.53,2490 3302.7,2538.18 3302.7,2547.7 v1(3305,2550)
NetR84_2: R84.2 U23.2 | length 109.8
  Bottom Layer w8: U23.2@3355,2614.65 3355,2505.47 R84.2@3355.47,2505
NetR85_1: R85.1 U21.5 U23.5 | length 314.1
  Bottom Layer w20: U23.5@3155,2945.35 3157.58,2947.93 3157.58,3167.1 R85.1@3160.47,3170 3160.47,3253.78 3159.25,3255 U21.5@3157.56,3255
NetR87_1: R87.1 U20.5 U21.3 | length 453.3
  Top Layer w8: v1(3425,3305) 3425,3245 3415,3235 3415,3170.47 R87.1@3414.53,3170 3414.53,3166.06 3455,3125.59 U20.5@3455,2945.35
  Bottom Layer w8: U21.3@3352.44,3305 v1(3425,3305)
NetR93_1: R93.1 U26.1
NetR94_2: R94.2 U26.2
NetR95_1: R95.1 U27.1
NetR96_2: R96.2 U27.2
NetR99_2: R99.2 U29.11
NetR100_2: R100.2 U29.10
NetU29_12: U29.12
NetU29_13: U29.13
NetU29_14: U29.14
NetU29_15: U29.15
uC_DI0: IC1.20 J1.50 R4.2 | length 3888.1
  Top Layer w8: J1.50@1637.24,4302.95 1723.66,4302.95 2016.61,4010 v1(2050,4010) ; R4.2@4395,3045.31 v1(4395,3005) 4395,2920 4428.46,2886.54 IC1.20@4457.48,2886.54
  Bottom Layer w8: v1(2050,4010) 2074.91,3985.09 2074.91,3682.47 2229.37,3528 4237,3528 4395,3370 v1(4395,3005)
uC_DI1: IC1.19 J1.52 R5.2 | length 3924.2
  Top Layer w8: J1.52@1637.24,4322.64 1726.6,4322.64 1994.24,4055 v1(2035,4055) ; R5.2@4450,3045.31 v1(4450,3002.66) 4450,2960 4482.03,2927.97 4482.03,2887.02 IC1.19@4482.52,2886.54
  Bottom Layer w8: v1(2035,4055) 2060,4055 2090.91,4024.09 2090.91,3689.09 2236,3544 4243.63,3544 4450,3337.63 v1(4450,3002.66)
uC_DI2: IC1.18 J1.54 R6.2 | length 3969.7
  Top Layer w8: J1.54@1637.24,4342.32 1729.54,4342.32 1976.86,4095 v1(2000,4095) ; R6.2@4505,3045.31 4506.24,3044.07 4506.24,2887.78 IC1.18@4507.48,2886.54
  Bottom Layer w8: v1(2000,4095) 2070,4095 2106.91,4058.09 2106.91,3695.72 2242.63,3560 4250.25,3560 4505,3305.25 v1(4505,3005)
uC_DI3: IC1.17 J1.56 R7.2 | length 4045.8
  Top Layer w8: J1.56@1637.24,4362.01 1732.48,4362.01 1949.49,4145 v1(1995,4145) ; IC1.17@4532.52,2886.54 4532.52,2977.52 v1(4560,3005) R7.2@4560,3045.31
  Bottom Layer w8: v1(1995,4145) 1996.75,4143.25 2081.24,4143.25 2122.91,4101.58 2122.91,3702.35 2249.25,3576 4256.88,3576 4560,3272.88 v1(4560,3005)
uC_DI4: IC1.14 J1.58 R17.2 | length 4074.6
  Top Layer w8: J1.58@1637.24,4381.69 1735.42,4381.69 1922.12,4195 v1(1980,4195) ; IC1.14@4607.48,2886.54 4607.48,2992.48 4615,3000 v1(4615,3005) R17.2@4615,3045.31
  Bottom Layer w8: v1(1980,4195) 2052.12,4195 2140,4107.12 2140,3720 2268,3592 4263.51,3592 4615,3240.51 v1(4615,3005)
uC_DI5: IC1.13 J1.60 R18.2 | length 4128.6
  Top Layer w8: J1.60@1637.24,4401.38 1738.37,4401.38 1899.75,4240 v1(1965,4240) ; IC1.13@4632.52,2886.54 4632.52,2932.52 4670,2970 v1(4670,3007.66) R18.2@4670,3045.31
  Bottom Layer w8: v1(1965,4240) 2029.75,4240 2156,4113.75 2156,3726.63 2274.63,3608 4270.14,3608 4670,3208.14 v1(4670,3007.66)
uC_DI6: IC1.12 J1.62 R19.2 | length 4182.1
  Top Layer w8: J1.62@1637.24,4421.06 1741.31,4421.06 1872.37,4290 v1(1955,4290) ; IC1.12@4657.48,2886.54 4657.48,2929.85 4725,2997.37 v1(4725,3005) R19.2@4725,3045.31
  Bottom Layer w8: v1(1955,4290) 2002.37,4290 2175,4117.37 2175,3740 2291,3624 4276.76,3624 4725,3175.76 v1(4725,3005)
uC_DI7: IC1.11 J1.64 R20.2 | length 4238.7
  Top Layer w8: J1.64@1637.24,4440.75 1744.25,4440.75 1855,4330 v1(1930,4330) ; IC1.11@4682.52,2886.54 4682.52,2907.4 4780,3004.88 v1(4780,3005) R20.2@4780,3045.31
  Bottom Layer w8: v1(1930,4330) 1985,4330 2191,4124 2191,3746.63 2297.63,3640 4283.39,3640 4780,3143.39 v1(4780,3005)
VCC_iso_AO: C40.2 C42.2 C44.2 IC3.1 IC4.1 R91.2 R92.2 U25.16 U26.8 U27.8 | length 27.2
  Top Layer w8: U25.16@1560,2655.55 U25.16@1560,2682.72
VIN: C27.1 C28.2 C29.2 C30.2 D9.1 IC2.37 pad.2 pad.3 pad.4 pad.5 pad.6 pad.7 pad.8 pad.9 pad.10 pad.11 pad.12 pad.13 pad.14 pad.15 pad.16 pad.17 pad.18 | length 110.4
  Bottom Layer w35: v4(4340,2575) 4344.78,2579.78 4344.78,2588.74 4407.58,2651.54 C28.2@4407.58,2657.42
Vref_AO: C43.2 C45.2 IC3.6 IC4.6 R93.2 R95.2
pads on no net: IC2.1 IC2.16 IC2.17 IC2.18 IC2.20 J1.69 J1.70 J5.5 J5.6 J5.7 J5.8 P2.2 U2.7 U2.8 U4.2 U4.3 U4.4 U5.7 U5.8 U6.2 U6.3 U6.4 U8.7 U8.8 U10.2 U10.3 U10.4 U11.7 U11.8 U12.2 U12.3 U12.4 U14.7 U14.8 U16.2 U16.3 U16.4 U17.7 U17.8 U18.2 U18.3 U18.4 U20.7 U20.8 U22.2 U22.3 U22.4 U23.7 U23.8 U24.2 U24.3 U24.4 U25.4 U25.5 U25.12 U25.13 U26.3 U27.3

## Polygon pours and split planes (outlines as drawn)
GND on Top Layer "Top Layer-GND" (solid, pour order 16): 1725,2725 3425,2725 3590,2560 4260,2560 4425,2725 6030,2725 7125,3820 7125,5010 7685,5010 7685,1000 2300,1000 2300,1570 2065,1805 2065,2155 2000,2220 1775,2220 1725,2270
GND_ISO_AO on Top Layer "Top Layer-GND_ISO_AO" (solid, pour order 22): 1010,2725 1690,2725 1690,2245 1755,2180 1975,2180 2020,2135 2020,1780 2250,1550 2250,990 1010,990
GND0 on Top Layer "ISO_GND_TOP" (solid, pour order 0): 1004.26,2830 3425,2830 3590,2995 4260,2995 4420,2835 5925,2835 6975,3885 6975,5010 1005,5010
GND on Bottom Layer "Bottom Layer-GND" (solid, pour order 14): 1725,2725 3425,2725 3590,2560 4260,2560 4425,2725 6030,2725 7125,3820 7125,5010 7685,5010 7685,1000 2300,1000 2300,1570 2065,1805 2065,2155 2000,2220 1775,2220 1725,2270
GND_Power on Bottom Layer "Bottom Layer-GND_Power" (solid, pour order 28): 3460,2760 3620,2600 4240,2600 4395,2755 4240,2910 3610,2910
GND_ISO_AO on Bottom Layer "Bottom Layer-GND_ISO_AO" (solid, pour order 20): 1010,2725 1010,990 2250,990 2250,1550 2020,1780 2020,2135 1975,2180 1755,2180 1690,2245 1690,2725
GND0 on Bottom Layer "GND_ISO_BOTTOM" (solid, pour order 2): 1005.41,2830 3425,2830 3590,2995 4260,2995 4420,2835 5920,2835 6975,3890 6975,5010 1005.41,5010
VIN on Layer 1 "Layer 1-VIN" (solid, pour order 26): 1725,2725 3425,2725 3610,2910 4240,2910 4425,2725 6030,2725 7125,3820 7125,5010 7685,5010 7685,1000 2300,1000 2300,1570 2065,1805 2065,2155 2000,2220 1775,2220 1725,2270
no net on Layer 1 "Layer 1-No Net" (solid, pour order 24): 1725,2725
+3.3V_ISO on Layer 1 "3.3V_ISO" (solid, pour order 4): 1004.59,2830 3425,2830 3590,2995 4260,2995 4420,2835 5925,2835 6975,3885 6975,5010 1004.59,5010
+5V on Layer 2 "Layer 2-+5V" (solid, pour order 18): 1725,2725 3425,2725 3590,2560 4260,2560 4425,2725 6030,2725 7125,3820 7125,5010 7685,5010 7685,1000 2300,1000 2300,1570 2065,1805 2065,2155 2000,2220 1775,2220 1725,2270
+5V_ISO on Layer 2 "5V_ISO" (solid, pour order 6): 1004.26,2830 3425,2830 3590,2995 4260,2995 4420,2835 5925,2835 6975,3885 6975,5010 1004.26,5010